# Altium PCB LM2736.PcbDoc
Units mil, origin at the board's own origin, x right, y up, seen from the top; angles counter-clockwise.
Board outline 6000 x 4000 mil, 4 copper layers (Top Layer, MidLayer1, MidLayer2, Bottom Layer); 20 components, 12 nets, 50 pads, 10 vias.
Unrouted connection lines stored in the file: 2.
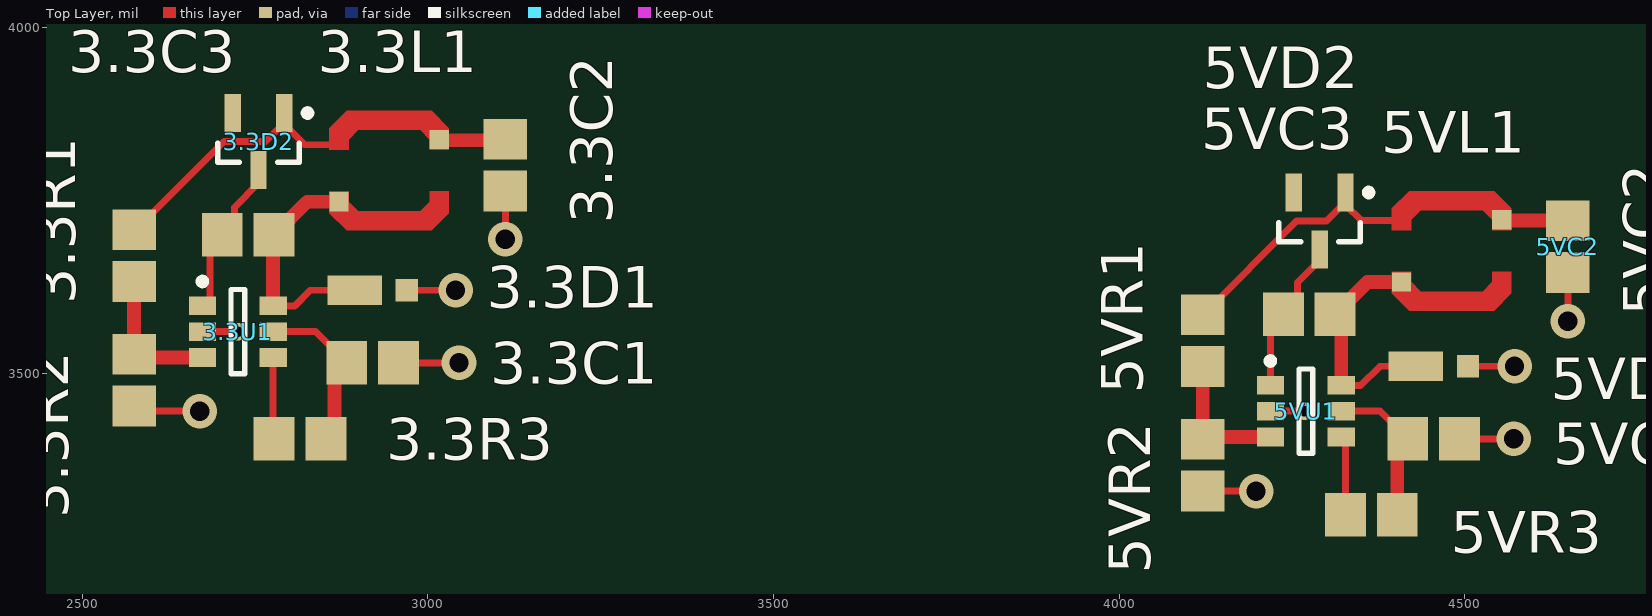
[diagram p0: Top Layer view]
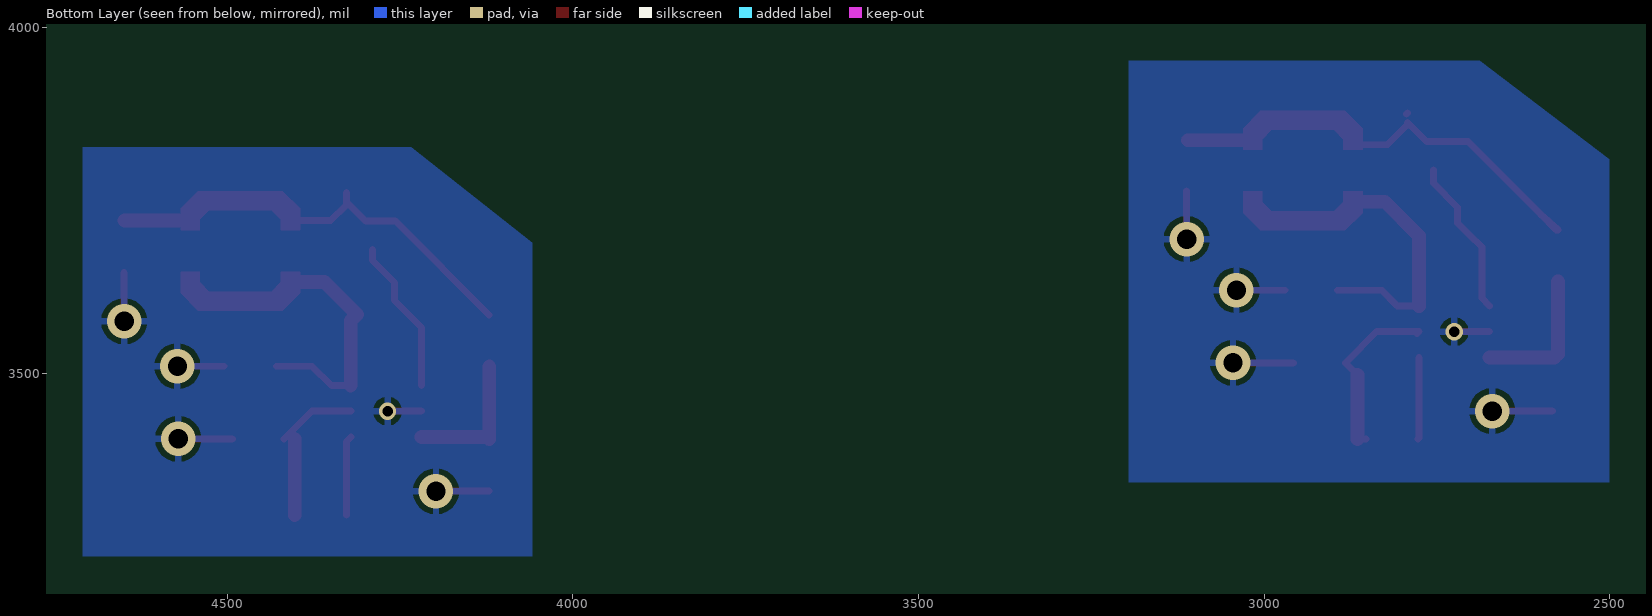
[diagram p1: Bottom Layer view, seen from below]
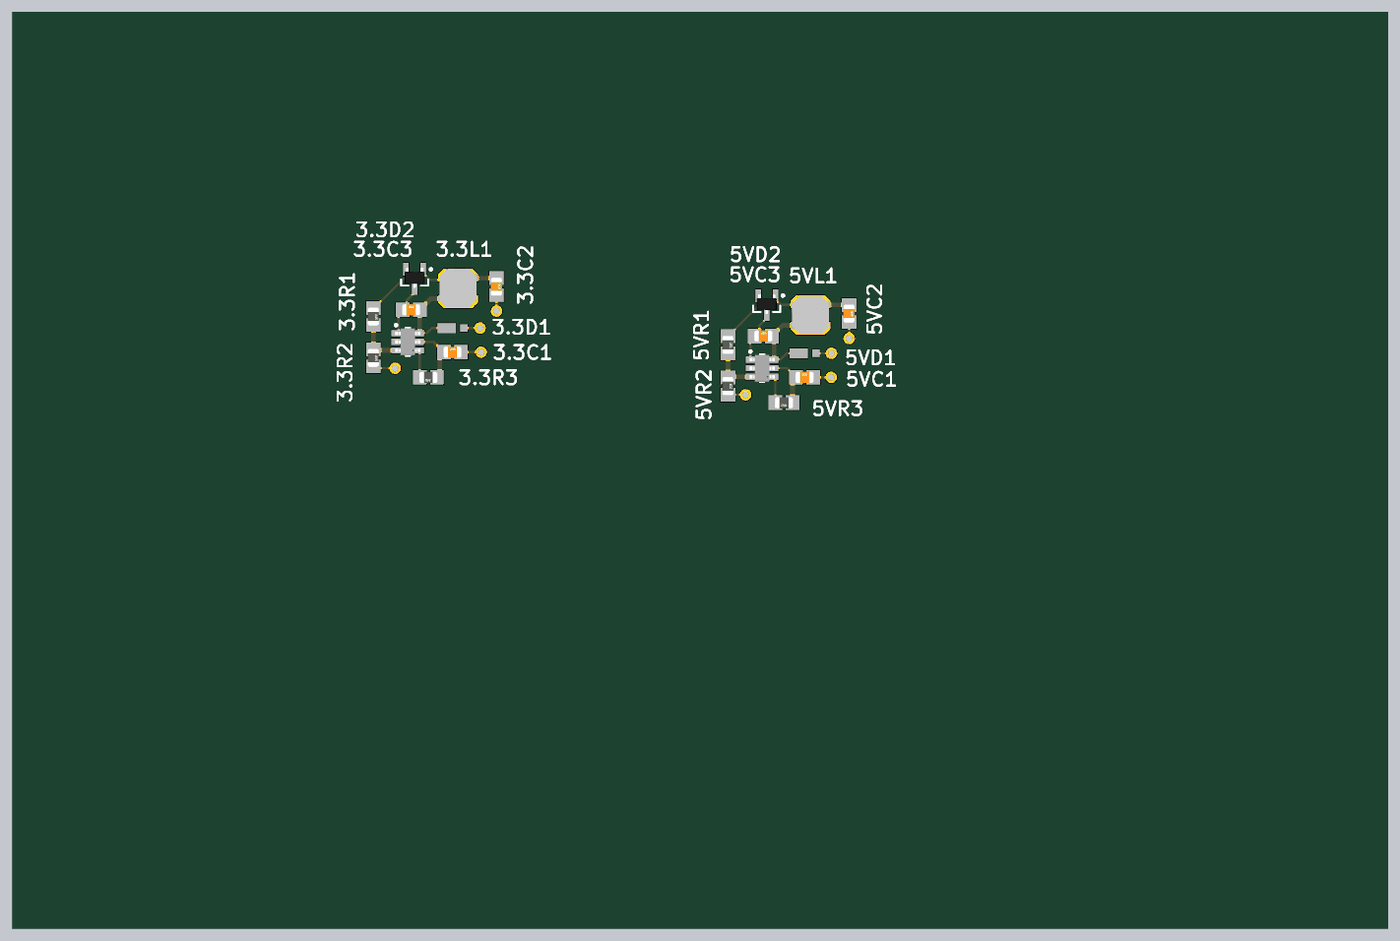
[diagram p2: 3D render of the assembled board from above, using the file's embedded part models]

## Layer stack, top to bottom
Top Layer: signal copper 1.4
Dielectric: core 12.6, FR-4, Dk 4.8
MidLayer1: signal copper 1.4
Dielectric: prepreg 12.6, FR-4, Dk 4.8
MidLayer2: signal copper 1.4
Dielectric: core 12.6, FR-4, Dk 4.8
Bottom Layer: signal copper 1.4

## Board outline
1000,1000 7000,1000 7000,5000 1000,5000

## Design rules (kind name [scope] priority, off if disabled: settings)
Clearance [All] p1: gap=8
FabricationTestPointUsage [All] p1: valid=2 allowmultiple=FALSE
MinimumSolderMaskSliver [All] p1: minsoldermaskwidth=1
PolygonConnect [All] p1: connectstyle=Relief reliefconductorwidth=10 reliefentries=4 polygonreliefangle="90 Angle"
RoutingVias [All] p1: holewidth=28 width=50 viastyle="Through Hole" minholewidth=10 minwidth=15 maxholewidth=28 maxwidth=50
ShortCircuit ShortCircuit_2 [(InNet('+5V') OR InNet('Net5VC3_2') OR InNet('+3.3V') OR InNet('Net3.3C3_2'))] p1: allowed=TRUE
ShortCircuit [All] p2: allowed=FALSE
SilkscreenOverComponentPads [All] p1: minsilkscreentomaskgap=10
SolderMaskExpansion [All] p1: expansion=4
Width [All] p1: maxlimit=50 minlimit=5 preferedwidth=10
24 further rules are at their usual default settings.

## Components (designator, comment, footprint, x,y, rotation, side; value= is the part's Value field where it differs from the comment)
3.3C1 "CAP 10 uF" 0805_Capacitor 2920,3515 r0 top
3.3C2 "CAP 22 uF" 0805_Capacitor 3112,3801 r270 top
3.3C3 "CAP 10000pF" 0805_Capacitor 2740,3700 r0 top
3.3D1 "SCHOTTKY 30V 1A" MicroSMP 2920,3620 r0 top
3.3D2 "SCHOTTKY 30V 1A" SOT-23 2755,3835 r270 top
3.3L1 "L_10uH_20%" LPS4018_inductor 2944,3793 r270 top
3.3R1 "R_0805_16.5k_1%" 0805_Resistor 2575,3670 r270 top
3.3R2 "R_0805_10k_1%" 0805_Resistor 2575,3490 r270 top
3.3R3 "R_0805_100k_1%" 0805_Resistor 2815,3405 r180 top
3.3U1 "Short Part Description" TSOT95P285X100-6M 2725,3560 r0 top
5VC1 "CAP 10 uF" 0805_Capacitor 4455,3405 r0 top
5VC2 "CAP 22 uF" 0805_Capacitor 4649,3683 r270 top
5VC3 "CAP 10000pF" 0805_Capacitor 4275,3585 r0 top
5VD1 "SCHOTTKY 30V 1A" MicroSMP 4455,3510 r0 top
5VD2 "SCHOTTKY 30V 1A" SOT-23 4290,3720 r270 top
5VL1 "L_10uH_20%" LPS4018_inductor 4481,3677 r270 top
5VR1 "R_0805_30K_1%" 0805_Resistor 4121,3547 r270 top
5VR2 "R_0805_10k_1%" 0805_Resistor 4121,3367 r270 top
5VR3 "R_0805_100k_1%" 0805_Resistor 4365,3295 r180 top
5VU1 "Short Part Description" TSOT95P285X100-6M 4270,3445 r0 top

## Footprints (in the part's own frame and the unit in brackets; to place one, negate y for a bottom-side part, rotate by r counter-clockwise, add the part's x,y. Pads: shape width x height; smd on the part's side, far side on the other; paste and mask are expansions set on the pad)
0805_Capacitor [mm] "0805 Capacitor"
  rect 1.5x1.6 smd: 1(-0.95,0) 2(0.95,0)
  body extent -1,-0.62 1,0.62, height 0.76
0805_Resistor [mm] "0805 Resistor"
  rect 1.5x1.6 smd: 1(-0.95,0) 2(0.95,0)
  body extent -1,-0.62 1,0.63, height 0.78
LPS4018_inductor [mil]
  rect 28x28 smd: 1(45,-72.5) 2(-45,72.5)
  Top Layer region: -30,-58.5 -45,-58.5 -59,-45 -59,45 -45,58.5 -30,58.5 -30,86.5 -61.5,86.5 -86.5,61.5 -86.5,-61.5 -61.5,-86.5 -30,-86.5
  Top Layer region: 30,58.5 45,58.5 59,45 59,-45 45,-58.5 30,-58.5 30,-86.5 61.5,-86.5 86.5,-61.5 86.5,61.5 61.5,86.5 30,86.5
  body extent -81,-81 81,81, height 71
MicroSMP [mil]
  rect 32x32 smd: 1(49.5,0)
  rect 79x43 smd: 2(-26,0)
SOT-23 [mm] "SOT23, 3-Leads, Body 3.0x2.7mm (max), Pitch 0.95mm, IPC Medium Density"
  rect 1.4x0.6 smd: 1(-1.05,0.95) 2(-1.05,-0.95) 3(1.05,0)
  silkscreen extent -1.17,-1.5 0.76,1.93, body extent -1.21,-1.1 0.99,1.1, height 1.1
TSOT95P285X100-6M [mm] "TSOT23, 6-Leads, Body 3.1x2.8mm (max), Pitch 0.95mm, IPC Low Density"
  rect 1x0.69 smd: 1(-1.3,0.95) 2(-1.3,0) 3(-1.3,-0.95) 4(1.3,-0.95) 5(1.3,0) 6(1.3,0.95)
  silkscreen extent -1.42,-1.55 0.25,1.97, body extent -1.4,-1.5 1.4,1.5, height 0.86

## Part data
3.3C1 5VC1: library part C_0805_10uF, "CAP CERM 10 uF"
3.3C2 5VC2: library part C_0805_22uF, "CAP CER 22UF 16V X5R 10% 0805"
3.3C3 5VC3: library part C_0805_10000pF, "CAP CERM 10000PF"
3.3D1 5VD1: library part D_Schottky_MSS1P3L-M3/89A, "DIODE SCHOTTKY 1A 30V MICROSMP"
3.3D2 5VD2: library part D_Schottky_BAT54-7-F, "DIODE SCHOTTKY 30V 200MW SOT23-3"
3.3L1 5VL1: "INDUCTOR PWR 10UH 20% SHIELD SMD"
3.3R1: "RES 16.5k OHM 1/8W 1% 0805 SMD"
3.3R2 5VR2: library part R_0805_10K_1%, "RES 10K OHM 1/8W 1% 0805 SMD"
3.3R3 5VR3: "RES 100K OHM 1/8W 1% 0805 SMD"
3.3U1 5VU1: library part U_LM2736YMK, "IC REG PWM STPDWN 750 mA"
5VR1: "RES 30K OHM 1/8W 1% 0805 SMD"

## Via types
v1: diameter 50, hole 28, Top Layer to Bottom Layer, 8 vias
v2: diameter 25, hole 15, Top Layer to Bottom Layer, 2 vias

## Nets (pads, with @x,y where several pads share a name; then routed paths per layer and width w, separated by ;. In a path a pad name is that pad's centre, name@x,y a point inside that pad or via, vN(x,y) a via of type N, cw(c..) or ccw(c..) an arc to the next point about the centre after c; other vN are vias at no path point)
+3.3V: 3.3C2.1 3.3D2.1 3.3L1.2 3.3R1.1 | length 689
  Top Layer w10: 3.3D2.1 3.3D2.1@2793.74,3875 ; 3.3L1.2@3017,3837 3017,3845 2997,3865 2924,3865 2892,3865 2871.5,3844.5 2871.5,3830.5 2821.5,3830.5 2792.4,3859.6 2792.4,3862.4 2765,3835 2705,3835 3.3R1.1@2600,3730 ; 3.3R1.1@2600,3730 2577.4,3707.4 3.3R1.1 3.3R1.1@2600,3730
  Top Layer w20: 3.3L1.2@3017,3837 3.3C2.1@3110.6,3837
+5V: 5VC2.1 5VD2.1 5VL1.2 5VR1.1 | length 654.9
  Top Layer w10: 5VR1.1 4256.6,3720 4300,3720 5VD2.1@4327.4,3747.4 ; 5VD2.1 5VD2.1@4327.4,3747.4 ; 5VL1.2@4555,3721 4555,3730 4536,3749 4427,3749 4406,3728 4406,3720.75 4350.25,3720.75 4327.4,3743.6 5VD2.1@4327.4,3747.4
  Top Layer w20: 5VL1.2@4555,3721 5VC2.1@4648.4,3721
+12V: 3.3C1.1 3.3R3.1 3.3U1.5 5VC1.1 5VR3.1 5VU1.5 | length 481.4
  Top Layer w10: 3.3U1.5@2778.78,3557.4 3.3U1.5 2837.6,3560 3.3C1.1 3.3C1.1@2865,3497.4 ; 3.3R3.1 3.3R3.1@2865,3405 ; 5VU1.5 4377.6,3445 5VC1.1
  Top Layer w20: 3.3R3.1@2865,3405 3.3C1.1@2865,3497.4 ; 5VR3.1 5VC1.1@4402.4,3404.8
GND: 3.3C1.2 3.3C2.2 3.3D1.1 3.3R2.2 3.3U1.2 5VC1.2 5VC2.2 5VD1.1 5VR2.2 5VU1.2 | length 709.4
  Top Layer w10: 3.3R2.2@2582.6,3445 v1(2670,3445) ; 3.3U1.2 v2(2725,3560) ; 3.3C1.2 v1(3045,3515) ; 3.3D1.1 v1(3040,3620) ; v1(3112,3694) 3.3C2.2 ; 5VR2.2 4197.4,3329.6 v1(4198,3329) ; 5VU1.2 v2(4268,3445) ; 5VC1.2 v1(4571,3405) ; 5VD1.1 v1(4572,3510) ; v1(4649,3575) 5VC2.2
Net3.3C3_1: 3.3C3.1 3.3D2.3 3.3U1.1 | length 229.9
  Top Layer w10: 3.3U1.1 2685,3608.58 2685,3682.4 3.3C3.1 2720,3717.4 2720,3740 2755,3775 3.3D2.3
Net3.3C3_2: 3.3C3.2 3.3D1.2 3.3L1.1 3.3U1.6 | length 344.3
  Top Layer w10: 3.3U1.6 2807.4,3597.4 2830,3620 3.3D1.2 ; 3.3C3.2@2776.18,3698.78 3.3C3.2
  Top Layer w20: 3.3U1.6 3.3C3.2@2776.18,3698.78 ; 3.3C3.2 2825.4,3748 3.3L1.1
Net3.3R1_2: 3.3R1.2 3.3R2.1 3.3U1.3 | length 206
  Top Layer w10: 3.3R2.1 3.3R2.1@2579.8,3522.6
  Top Layer w20: 3.3R2.1 3.3R1.2 ; 3.3R2.1@2579.8,3522.6 3.3U1.3
Net3.3R3_2: 3.3R3.2 3.3U1.4 | length 118.2
  Top Layer w10: 3.3U1.4 2776.18,3406.42 3.3R3.2
Net5VC3_1: 5VC3.1 5VD2.3 5VU1.1 | length 225.7
  Top Layer w10: 5VU1.1 4218.82,3566.22 5VC3.1 4258,3605.4 4258,3631 4290,3663 5VD2.3
Net5VC3_2: 5VC3.2 5VD1.2 5VL1.1 5VU1.6 | length 341.1
  Top Layer w10: 5VU1.6 4349.4,3482.4 4377,3510 5VD1.2
  Top Layer w20: 5VU1.6 4321.18,3576.22 5VC3.2 4359.4,3632 5VL1.1
Net5VR1_2: 5VR1.2 5VR2.1 5VU1.3 | length 204.3
  Top Layer w20: 5VR1.2 5VR2.1 4124.2,3407.6 5VU1.3
Net5VR3_2: 5VR3.2 5VU1.4 | length 115.3
  Top Layer w10: 5VU1.4 4327.6,3401.18 5VR3.2
pads on no net: 3.3D2.2 5VD2.2

## Polygon pours and split planes (outlines as drawn)
GND on Bottom Layer "Top Layer-No Net" (solid, pour order 3): 4709,3235 4049,3235 4059,3235 4059,3688.87 4234,3827 4709,3827
GND on Bottom Layer "Top Layer-No Net" (solid, pour order 4): 3196,3342 2490,3342 2500.7,3342 2500.7,3809.67 2687.89,3952 3196,3952